# Altium PCB GTU-V1.0-20160325 .PcbDoc (part 5 of 5)
Units mil, origin at the board's own origin, x right, y up, seen from the top; angles counter-clockwise.
Board outline 6299.21 x 4330.71 mil, 4 copper layers (Top Layer, POWER, GND, Bottom Layer); 208 components, 165 nets, 695 pads, 348 vias.
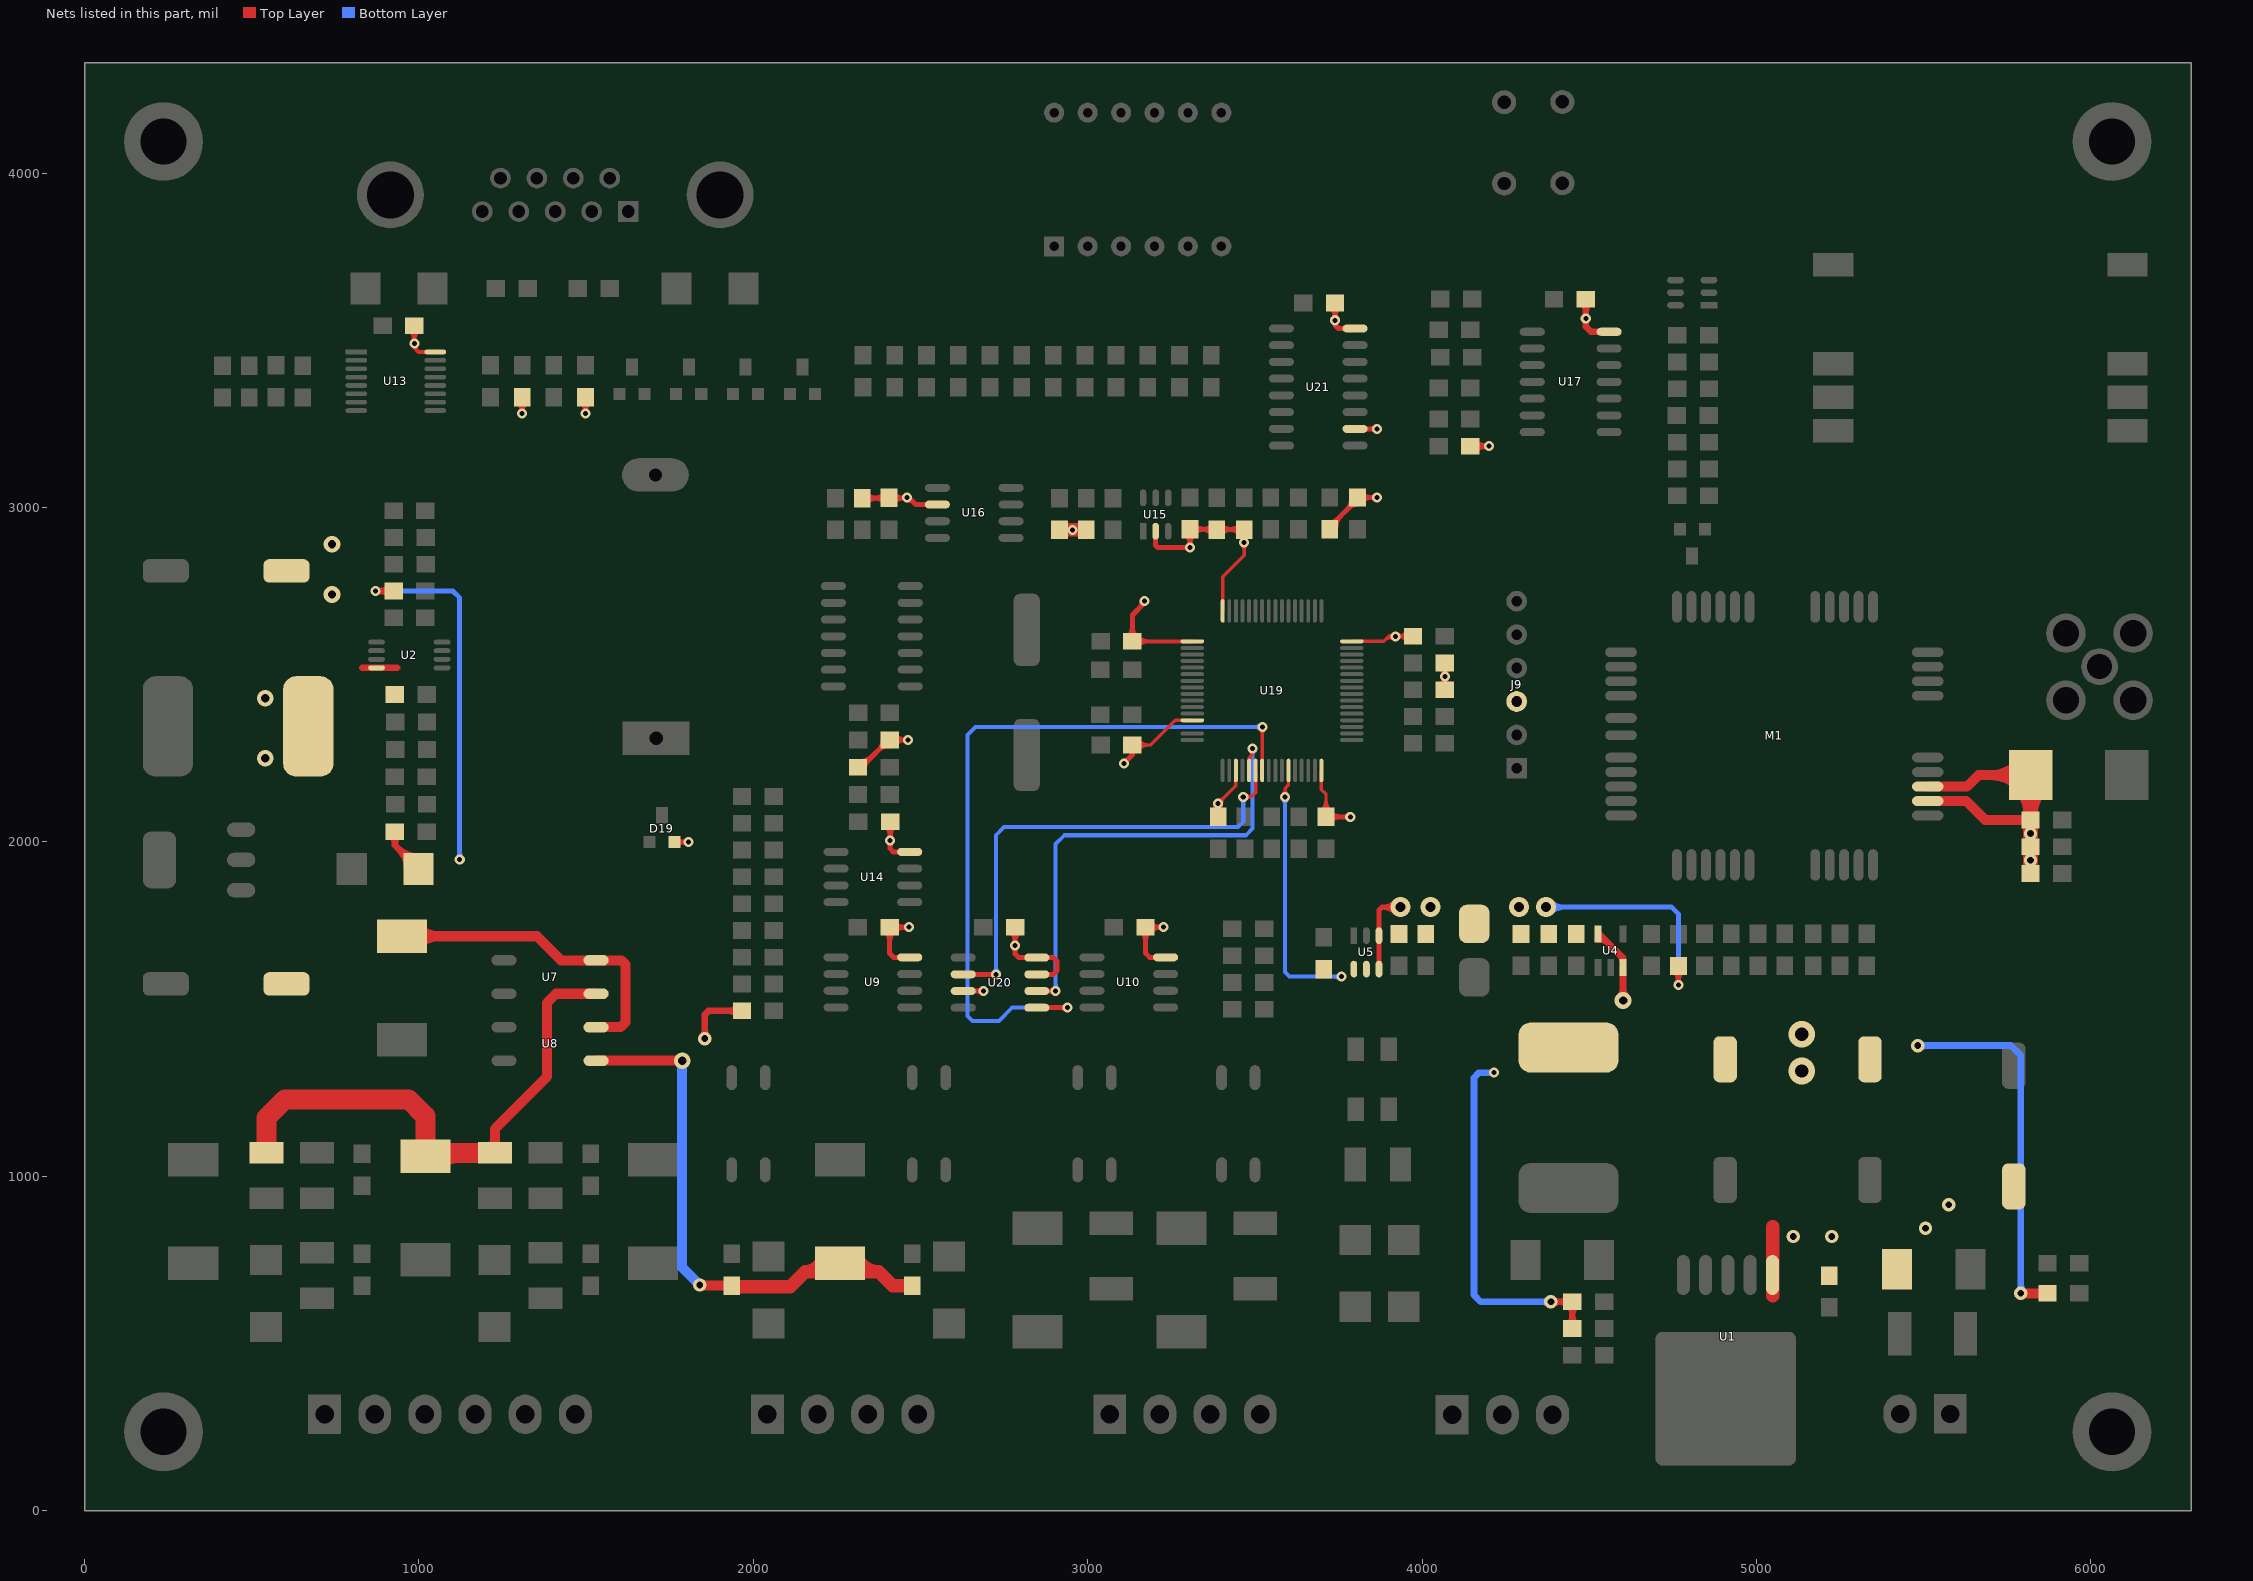
[diagram p7: the nets of this part, all layers, seen from the top]

## Via types
v1: diameter 30, hole 15, Top Layer to Bottom Layer, 262 vias
v2: diameter 40, hole 20, Top Layer to Bottom Layer, 36 vias
v3: diameter 40, hole 40, Top Layer to Bottom Layer, 16 vias
v4: diameter 80, hole 40, Top Layer to Bottom Layer, 12 vias
v5: diameter 60, hole 30, Top Layer to Bottom Layer, 11 vias
v6: diameter 50, hole 25, Top Layer to Bottom Layer, 10 vias
v7: diameter 70, hole 35, Top Layer to Bottom Layer, 1 vias

## Nets (pads, with @x,y where several pads share a name; then routed paths per layer and width w, separated by ;. In a path a pad name is that pad's centre, name@x,y a point inside that pad or via, vN(x,y) a via of type N, cw(c..) or ccw(c..) an arc to the next point about the centre after c; other vN are vias at no path point) (continued)
SPIMISO: U19.22 U20.2 | length 1732.1
  Top Layer w10: v1(3465,2135) 3489.54,2135 3501.89,2147.35 U19.22@3501.89,2213.86 ; 3489.14,2135 cw(c3489.14,2159.14) 3472.07,2142.07 ccw(c3489.14,2159.14) 3489.14,2135 ; 3489.14,2135 ccw(c3489.14,2110.86) 3472.07,2127.93 cw(c3489.14,2110.86) 3489.14,2135
  Top Layer w15: U20.2@2627.6,1604.22 v1(2726,1604.22) ; 2707.89,1604.22 cw(c2707.89,1586.11) 2720.7,1598.92 ccw(c2707.89,1586.11) 2707.89,1604.22 ; 2707.89,1604.22 ccw(c2707.89,1622.33) 2720.7,1609.52 cw(c2707.89,1622.33) 2707.89,1604.22
  Bottom Layer w12: v1(2726,1604.22) 2726,2020 2750,2044 3450,2044 3465,2059 v1@3465,2144 ; 2726,1625.95 cw(c2704.27,1625.95) 2719.64,1610.58 ccw(c2704.27,1625.95) 2726,1625.95 ; 2726,1625.95 ccw(c2747.73,1625.95) 2732.36,1610.58 cw(c2747.73,1625.95) 2726,1625.95 ; 3465,2113.27 cw(c3486.73,2113.27) 3471.36,2128.64 ccw(c3486.73,2113.27) 3465,2113.27 ; 3465,2113.27 ccw(c3443.27,2113.27) 3458.64,2128.64 cw(c3443.27,2113.27) 3465,2113.27
SPIMOSI: U19.23 U20.5 | length 2544.6
  Top Layer w10: U19.23@3521.57,2213.86 v1@3521.57,2344 ; v1@3514.93,2336.93 cw(c3498.88,2320.88) 3521.57,2320.88 ccw(c3498.88,2320.88) v1@3514.93,2336.93 ; 3521.57,2318.83 cw(c3547.17,2318.83) 3529.07,2336.93 ccw(c3547.17,2318.83) 3521.57,2318.83
  Top Layer w15: U20.5@2847.6,1504.22 v1(2939.22,1504.22) ; 2921.11,1504.22 cw(c2921.11,1486.11) 2933.92,1498.92 ccw(c2921.11,1486.11) 2921.11,1504.22 ; 2921.11,1504.22 ccw(c2921.11,1522.33) 2933.92,1509.52 cw(c2921.11,1522.33) 2921.11,1504.22
  Bottom Layer w12: v1(2939.22,1504.22) 2774.22,1504.22 2735,1465 2655,1465 2640,1480 2640,2320 2664,2344 v1(3522,2344) ; 2917.49,1504.22 cw(c2917.49,1482.49) 2932.86,1497.86 ccw(c2917.49,1482.49) 2917.49,1504.22 ; 2917.49,1504.22 ccw(c2917.49,1525.95) 2932.86,1510.58 cw(c2917.49,1525.95) 2917.49,1504.22 ; 3500.27,2344 cw(c3500.27,2322.27) 3515.64,2337.64 ccw(c3500.27,2322.27) 3500.27,2344 ; 3500.27,2344 ccw(c3500.27,2365.73) 3515.64,2350.36 cw(c3500.27,2365.73) 3500.27,2344
SPISCK: U19.21 U20.6 | length 1679.8
  Top Layer w10: U19.21@3482.2,2213.86 3482.2,2252.2 3493,2263 ; v1(3493,2279) 3493,2263 ; 3493,2263 cw(c3500.8,2263) 3497.38,2270.01 ccw(c3500.8,2263) 3493,2263 ; 3493,2263 ccw(c3485.2,2263) 3488.62,2270.01 cw(c3485.2,2263) 3493,2263 ; U19.21@3483.11,2242.95 cw(c3507.63,2242.95) 3490.29,2260.29 ccw(c3507.63,2242.95) U19.21@3483.11,2242.95
  Top Layer w15: U20.6@2847.6,1554.22 v1(2904.22,1554.22) ; 2886.11,1554.22 cw(c2886.11,1536.11) 2898.92,1548.92 ccw(c2886.11,1536.11) 2886.11,1554.22 ; 2886.11,1554.22 ccw(c2886.11,1572.33) 2898.92,1559.52 cw(c2886.11,1572.33) 2886.11,1554.22
  Bottom Layer w12: v1(2904.22,1554.22) 2904.22,1994.22 2930,2020 3473,2020 3493,2040 v1(3493,2279) ; 2904.22,1575.95 cw(c2882.49,1575.95) 2897.86,1560.58 ccw(c2882.49,1575.95) 2904.22,1575.95 ; 2904.22,1575.95 ccw(c2925.95,1575.95) 2910.58,1560.58 cw(c2925.95,1575.95) 2904.22,1575.95 ; 3493,2257.27 cw(c3514.73,2257.27) 3499.36,2272.64 ccw(c3514.73,2257.27) 3493,2257.27 ; 3493,2257.27 ccw(c3471.27,2257.27) 3486.64,2272.64 cw(c3471.27,2257.27) 3493,2257.27
VCC_3V: C8.1 C9.1 C11.1 C12.1 C14.1 C15.1 C19.2 C20.1 C32.1 C33.1 C38.1 C39.1 C40.1 C41.1 C42.1 C43.1 C44.1 C45.1 C46.1 D19.2 J9.3 L3.2 R12.2 R22.2 R23.2 R27.2 R28.2 R30.2 R43.2 R44.2 R47.2 R57.1 R71.2 R75.2 R76.2 R87.2 U5.3 U5.4 U9.8 U10.8 U13.16 U14.8 U15.2 U16.2 U17.14 U19.1 U19.13 U19.19 U19.32 U19.48 U19.64 U20.3 U20.7 U20.8 U21.10 U21.16 | length 12255.2
  Top Layer w10: C45.1@3133.6,2290 3188,2290 3261.78,2363.78 U19.13@3312.6,2363.78 ; v1(3390,2115) 3442.83,2167.83 U19.19@3442.83,2213.86 ; U19.64@3403.46,2690.87 3403.46,2793.46 3467.6,2857.6 C43.1@3467.6,2934 ; U19.32@3698.74,2213.86 3698.74,2156.26 3712.6,2142.4 C41.1@3712.6,2075 ; U19.48@3789.61,2600 3885,2600 3900,2615 ; C42.1@3972.6,2615 3900,2615 ; 3184.38,2290 cw(c3184.38,2338.28) 3150.24,2304.14 ccw(c3184.38,2338.28) 3184.38,2290 ; 3184.38,2290 ccw(c3184.38,2241.72) 3150.24,2275.86 cw(c3184.38,2241.72) 3184.38,2290 ; 3407.07,2132.07 cw(c3390,2149.14) 3390,2125 ccw(c3390,2149.14) 3407.07,2132.07 ; 3407.07,2132.07 ccw(c3424.14,2115) 3400,2115 cw(c3424.14,2115) 3407.07,2132.07 ; 3467.6,2870.86 cw(c3491.74,2870.86) 3474.67,2887.93 ccw(c3491.74,2870.86) 3467.6,2870.86 ; 3467.6,2870.86 ccw(c3443.46,2870.86) 3460.53,2887.93 cw(c3443.46,2870.86) 3467.6,2870.86 ; v1@3467.6,2883.22 cw(c3515.88,2883.22) 3481.74,2917.36 ccw(c3515.88,2883.22) v1@3467.6,2883.22 ; v1@3467.6,2883.22 ccw(c3419.31,2883.22) 3453.46,2917.36 cw(c3419.31,2883.22) v1@3467.6,2883.22 ; C43.1@3467.6,2919.14 cw(c3443.46,2919.14) 3460.53,2902.07 ccw(c3443.46,2919.14) C43.1@3467.6,2919.14 ; C43.1@3467.6,2919.14 ccw(c3491.74,2919.14) 3474.67,2902.07 cw(c3491.74,2919.14) C43.1@3467.6,2919.14 ; 3712.6,2125.78 cw(c3664.31,2125.78) 3698.46,2091.64 ccw(c3664.31,2125.78) 3712.6,2125.78 ; 3712.6,2125.78 ccw(c3760.88,2125.78) 3726.74,2091.64 cw(c3760.88,2125.78) 3712.6,2125.78 ; 3900,2615 cw(c3900,2600) 3912,2609 ccw(c3900,2600) 3900,2615 ; 3900,2615 ccw(c3900,2630) 3912,2621 cw(c3900,2630) 3900,2615 ; v1(3920,2615) ccw(c3915.51,2578.48) 3889.5,2604.5 cw(c3915.51,2578.48) v1(3920,2615) ; v1(3920,2615) ccw(c3910.15,2601.42) 3898.28,2613.28 cw(c3910.15,2601.42) v1(3920,2615) ; v1@3921.81,2615 cw(c3921.81,2566.72) 3955.96,2600.86 ccw(c3921.81,2566.72) v1@3921.81,2615 ; v1@3921.81,2615 ccw(c3921.81,2663.28) 3955.96,2629.14 cw(c3921.81,2663.28) v1@3921.81,2615 ; 3944.14,2615 cw(c3944.14,2639.14) 3927.07,2622.07 ccw(c3944.14,2639.14) 3944.14,2615 ; 3944.14,2615 ccw(c3944.14,2590.86) 3927.07,2607.93 cw(c3944.14,2590.86) 3944.14,2615 ; 3890,2605 cw(c3903.18,2591.82) 3914.13,2606.91 ccw(c3903.18,2591.82) 3890,2605
  Top Layer w12: C19.2@986.21,3544 986.21,3478 999.21,3465 U13.16@1048.71,3465 ; v1(1308.55,3280.67) R28.2@1308.55,3330 ; v1(1498.21,3281) R27.2@1498.21,3330 ; C44.1@3133.6,2600 U19.1@3312.6,2600 ; v1@986.21,3498.13 cw(c1032.08,3498.13) 999.65,3530.56 ccw(c1032.08,3498.13) v1@986.21,3498.13 ; v1@986.21,3498.13 ccw(c940.34,3498.13) 972.78,3530.56 cw(c940.34,3498.13) v1@986.21,3498.13 ; 986.21,3511.73 cw(c964.48,3511.73) 979.85,3496.36 ccw(c964.48,3511.73) 986.21,3511.73 ; 986.21,3511.73 ccw(c1007.94,3511.73) 992.58,3496.36 cw(c1007.94,3511.73) 986.21,3511.73 ; v1@1308.55,3281.63 cw(c1354.42,3281.63) 1321.98,3314.06 ccw(c1354.42,3281.63) v1@1308.55,3281.63 ; v1@1308.55,3281.63 ccw(c1262.68,3281.63) 1295.11,3314.06 cw(c1262.68,3281.63) v1@1308.55,3281.63 ; 1308.55,3302.39 cw(c1286.82,3302.39) 1302.18,3287.03 ccw(c1286.82,3302.39) 1308.55,3302.39 ; 1308.55,3302.39 ccw(c1330.27,3302.39) 1314.91,3287.03 cw(c1330.27,3302.39) 1308.55,3302.39 ; v1@1498.21,3281.63 cw(c1544.08,3281.63) 1511.65,3314.06 ccw(c1544.08,3281.63) v1@1498.21,3281.63 ; v1@1498.21,3281.63 ccw(c1452.34,3281.63) 1484.78,3314.06 cw(c1452.34,3281.63) v1@1498.21,3281.63 ; R27.2@1498.21,3302.73 cw(c1476.48,3302.73) 1491.85,3287.36 ccw(c1476.48,3302.73) R27.2@1498.21,3302.73 ; R27.2@1498.21,3302.73 ccw(c1519.94,3302.73) 1504.58,3287.36 cw(c1519.94,3302.73) R27.2@1498.21,3302.73 ; 3181.97,2600 cw(c3181.97,2645.87) 3149.53,2613.44 ccw(c3181.97,2645.87) 3181.97,2600 ; 3181.97,2600 ccw(c3181.97,2554.13) 3149.53,2586.56 cw(c3181.97,2554.13) 3181.97,2600 ; v1@992.89,3483.96 ccw(c999.86,3477.65) 993.21,3471 cw(c999.86,3477.65) v1@992.89,3483.96
  Top Layer w15: D19.2@1764.21,2000 v1(1806,2000) ; R76.2@2313,2223 R76.2@2326.21,2223 ; R47.2@2325.6,3028 2467,3028 2486,3009 U16.2@2550.6,3009 ; R76.2@2326.21,2227 R75.2@2408.21,2309 ; R75.2@2408.21,2305 v1(2462,2305) ; C20.1@2409.21,2060 2409.21,1979.79 2419,1970 U14.8@2467.6,1970 ; 2437.06,3028 ccw(c2437.06,3052.93) v1@2454.7,3035.3 ; v1@2460,3022.5 cw(c2460,2992.32) 2481.34,3013.66 ; v1(2465,1745) C14.1@2407.6,1745 2407.6,1666.4 2419,1655 U9.8@2467.6,1655 ; U20.3@2627.6,1554.22 v1(2687.78,1554.22) ; C39.1@2782.6,1745 2782.6,1665.4 2793.78,1654.22 2896.78,1654.22 2908,1643 2908,1615 2897.22,1604.22 U20.7@2847.6,1604.22 ; v1(3108,2235) 3133.6,2260.6 ; C45.1@3133.6,2290 3133.6,2260.6 ; C44.1@3133.6,2600 3133.6,2678.6 3170,2715 v1(3170,2720) ; U15.2@3203.1,2929 3203.1,2886.9 3210,2880 v1@3305.6,2880 ; v1@3230,1745 C15.1@3172.6,1745 3172.6,1667.4 3185,1655 U10.8@3232.6,1655 ; v1(3305.6,2880.6) R44.2@3305.6,2935 3466.6,2935 C43.1@3467.6,2934 ; C41.1@3712.6,2075 v1(3785,2075) ; R71.2@3723.85,2935 R71.2@3723.85,2947.5 ; R71.2@3723.85,2942.5 R30.2@3806.35,3025 ; C46.1@3739.21,3611.61 3739.21,3545.79 3749.61,3535.39 U21.16@3799.21,3535.39 ; U21.10@3799.21,3235.39 v1(3865,3235.39) ; R30.2@3806.35,3030 v1(3865,3030) ; U5.4@3870.83,1619.78 3870.83,1795.83 3880,1805 v5(3935,1805) ; v1(4766.21,1572.79) R12.2@4766.21,1629 ; 1787.89,2000 cw(c1787.89,1981.89) 1800.7,1994.7 ccw(c1787.89,1981.89) 1787.89,2000 ; 1787.89,2000 ccw(c1787.89,2018.11) 1800.7,2005.3 cw(c1787.89,2018.11) 1787.89,2000 ; 1789.56,2000 cw(c1789.56,2025.35) 1771.64,2007.42 ccw(c1789.56,2025.35) 1789.56,2000 ; 1789.56,2000 ccw(c1789.56,1974.65) 1771.64,1992.58 cw(c1789.56,1974.65) 1789.56,2000 ; 2367.85,3028 cw(c2367.85,3070.25) 2337.97,3040.37 ccw(c2367.85,3070.25) 2367.85,3028 ; 2367.85,3028 ccw(c2367.85,2985.75) 2337.97,3015.63 cw(c2367.85,2985.75) 2367.85,3028 ; 2407.6,1702.75 cw(c2449.85,1702.75) 2419.97,1732.63 ccw(c2449.85,1702.75) 2407.6,1702.75 ; 2407.6,1702.75 ccw(c2365.35,1702.75) 2395.22,1732.63 cw(c2365.35,1702.75) 2407.6,1702.75 ; 2409.21,1986.89 cw(c2427.32,1986.89) 2414.52,1999.7 ccw(c2427.32,1986.89) 2409.21,1986.89 ; 2409.21,1986.89 ccw(c2391.11,1986.89) 2403.91,1999.7 cw(c2391.11,1986.89) 2409.21,1986.89 ; v1@2409.21,2017.75 cw(c2451.46,2017.75) 2421.59,2047.63 ccw(c2451.46,2017.75) v1@2409.21,2017.75 ; v1@2409.21,2017.75 ccw(c2366.96,2017.75) 2396.84,2047.63 cw(c2366.96,2017.75) v1@2409.21,2017.75 ; 2409.21,2023.11 cw(c2391.11,2023.11) 2403.91,2010.3 ccw(c2391.11,2023.11) 2409.21,2023.11 ; 2409.21,2023.11 ccw(c2427.32,2023.11) 2414.52,2010.3 cw(c2427.32,2023.11) 2409.21,2023.11 ; 2443.89,2305 cw(c2443.89,2286.89) 2456.7,2299.7 ccw(c2443.89,2286.89) 2443.89,2305 ; 2443.89,2305 ccw(c2443.89,2323.11) 2456.7,2310.3 cw(c2443.89,2323.11) 2443.89,2305 ; 2446.89,1745 cw(c2446.89,1726.89) 2459.7,1739.7 ccw(c2446.89,1726.89) 2446.89,1745 ; 2446.89,1745 ccw(c2446.89,1763.11) 2459.7,1750.3 cw(c2446.89,1763.11) 2446.89,1745 ; v1@2452.35,1745 cw(c2452.35,1787.25) 2422.47,1757.37 ccw(c2452.35,1787.25) v1@2452.35,1745 ; v1@2452.35,1745 ccw(c2452.35,1702.75) 2422.47,1732.63 cw(c2452.35,1702.75) v1@2452.35,1745 ; v1@2452.96,2305 cw(c2452.96,2347.25) 2423.09,2317.37 ccw(c2452.96,2347.25) v1@2452.96,2305 ; v1@2452.96,2305 ccw(c2452.96,2262.75) 2423.09,2292.63 cw(c2452.96,2262.75) v1@2452.96,2305 ; 2669.67,1554.22 cw(c2669.67,1536.11) 2682.48,1548.92 ccw(c2669.67,1536.11) 2669.67,1554.22 ; 2669.67,1554.22 ccw(c2669.67,1572.33) 2682.48,1559.52 cw(c2669.67,1572.33) 2669.67,1554.22 ; 2782.6,1671.89 cw(c2800.7,1671.89) 2787.9,1684.7 ccw(c2800.7,1671.89) 2782.6,1671.89 ; 2782.6,1671.89 ccw(c2764.49,1671.89) 2777.3,1684.7 cw(c2764.49,1671.89) 2782.6,1671.89 ; v1@2782.6,1702.75 cw(c2824.85,1702.75) 2794.97,1732.63 ccw(c2824.85,1702.75) v1@2782.6,1702.75 ; v1@2782.6,1702.75 ccw(c2740.35,1702.75) 2770.22,1732.63 cw(c2740.35,1702.75) v1@2782.6,1702.75 ; 2782.6,1708.11 cw(c2764.49,1708.11) 2777.3,1695.3 ccw(c2764.49,1708.11) 2782.6,1708.11 ; 2782.6,1708.11 ccw(c2800.7,1708.11) 2787.9,1695.3 cw(c2800.7,1708.11) 2782.6,1708.11 ; 3120.8,2247.8 cw(c3108,2260.61) 3108,2242.5 ccw(c3108,2260.61) 3120.8,2247.8 ; 3120.8,2247.8 ccw(c3133.61,2235) 3115.5,2235 cw(c3133.61,2235) 3120.8,2247.8 ; 3133.6,2260.6 cw(c3149.54,2260.6) 3141.94,2274.62 ccw(c3149.54,2260.6) 3133.6,2260.6 ; 3133.6,2260.6 ccw(c3117.65,2260.6) 3125.25,2274.62 cw(c3117.65,2260.6) 3133.6,2260.6 ; 3133.6,2642.25 cw(c3091.35,2642.25) 3121.22,2612.37 ccw(c3091.35,2642.25) 3133.6,2642.25 ; 3133.6,2642.25 ccw(c3175.85,2642.25) 3145.97,2612.37 cw(c3175.85,2642.25) 3133.6,2642.25 ; 3172.6,1702.75 cw(c3214.85,1702.75) 3184.97,1732.63 ccw(c3214.85,1702.75) 3172.6,1702.75 ; 3172.6,1702.75 ccw(c3130.35,1702.75) 3160.22,1732.63 cw(c3130.35,1702.75) 3172.6,1702.75 ; 3208.89,1745 cw(c3208.89,1726.89) 3221.7,1739.7 ccw(c3208.89,1726.89) 3208.89,1745 ; 3208.89,1745 ccw(c3208.89,1763.11) 3221.7,1750.3 cw(c3208.89,1763.11) 3208.89,1745 ; v1@3217.35,1745 cw(c3217.35,1787.25) 3187.47,1757.37 ccw(c3217.35,1787.25) v1@3217.35,1745 ; v1@3217.35,1745 ccw(c3217.35,1702.75) 3187.47,1732.63 cw(c3217.35,1702.75) v1@3217.35,1745 ; v1@3300.3,2885.9 ccw(c3287.49,2898.7) 3305.6,2898.7 ; v1@3300.3,2885.9 cw(c3286.05,2900.15) 3286.05,2880 ccw(c3286.05,2900.15) v1@3300.3,2885.9 ; v1@3300.3,2885.9 ccw(c3287.49,2898.7) 3305.6,2898.7 ; v1@3305.6,2890.25 cw(c3347.85,2890.25) 3317.97,2920.13 ccw(c3347.85,2890.25) v1@3305.6,2890.25 ; v1@3305.6,2890.25 ccw(c3263.35,2890.25) 3293.22,2920.13 cw(c3263.35,2890.25) v1@3305.6,2890.25 ; 3305.6,2898.7 ccw(c3323.7,2898.7) 3310.9,2885.9 cw(c3323.7,2898.7) 3305.6,2898.7 ; 3347.85,2935 cw(c3347.85,2977.25) 3317.97,2947.37 ccw(c3347.85,2977.25) 3347.85,2935 ; 3347.85,2935 ccw(c3347.85,2892.75) 3317.97,2922.63 cw(c3347.85,2892.75) 3347.85,2935 ; v1@3739.21,3569.37 cw(c3781.46,3569.37) 3751.59,3599.24 ccw(c3781.46,3569.37) v1@3739.21,3569.37 ; v1@3739.21,3569.37 ccw(c3696.96,3569.37) 3726.84,3599.24 cw(c3696.96,3569.37) v1@3739.21,3569.37 ; 3754.85,2075 cw(c3754.85,2117.25) 3724.97,2087.37 ccw(c3754.85,2117.25) 3754.85,2075 ; 3754.85,2075 ccw(c3754.85,2032.75) 3724.97,2062.63 cw(c3754.85,2032.75) 3754.85,2075 ; 3766.89,2075 cw(c3766.89,2056.89) 3779.7,2069.7 ccw(c3766.89,2056.89) 3766.89,2075 ; 3766.89,2075 ccw(c3766.89,2093.11) 3779.7,2080.3 cw(c3766.89,2093.11) 3766.89,2075 ; 3846.89,3030 cw(c3846.89,3011.89) 3859.7,3024.7 ccw(c3846.89,3011.89) 3846.89,3030 ; 3846.89,3030 ccw(c3846.89,3048.11) 3859.7,3035.3 cw(c3846.89,3048.11) 3846.89,3030 ; 3846.89,3235.39 cw(c3846.89,3217.28) 3859.7,3230.08 ccw(c3846.89,3217.28) 3846.89,3235.39 ; 3846.89,3235.39 ccw(c3846.89,3253.49) 3859.7,3240.69 cw(c3846.89,3253.49) 3846.89,3235.39 ; 3848.6,3030 cw(c3848.6,3072.25) 3818.72,3042.37 ccw(c3848.6,3072.25) 3848.6,3030 ; 3848.6,3030 ccw(c3848.6,2987.75) 3818.72,3017.63 cw(c3848.6,2987.75) 3848.6,3030 ; 3880.68,1805 cw(c3880.68,1750.68) 3919.09,1789.09 ccw(c3880.68,1750.68) 3880.68,1805 ; 3880.68,1805 ccw(c3880.68,1859.32) 3919.09,1820.91 cw(c3880.68,1859.32) 3880.68,1805 ; v1@4766.21,1584.25 cw(c4808.46,1584.25) 4778.59,1614.13 ccw(c4808.46,1584.25) v1@4766.21,1584.25 ; v1@4766.21,1584.25 ccw(c4723.96,1584.25) 4753.84,1614.13 cw(c4723.96,1584.25) v1@4766.21,1584.25 ; 4766.21,1590.89 cw(c4748.11,1590.89) 4760.91,1578.09 ccw(c4748.11,1590.89) 4766.21,1590.89 ; 4766.21,1590.89 ccw(c4784.32,1590.89) 4771.52,1578.09 cw(c4784.32,1590.89) 4766.21,1590.89 ; R76.2@2315.5,2240.5 ccw(c2315.5,2298.95) 2356.83,2257.62 cw(c2315.5,2298.95) R76.2@2315.5,2240.5 ; R76.2@2333,2223 cw(c2359.04,2223) 2340.63,2241.42 ccw(c2359.04,2223) R76.2@2333,2223 ; 2360.94,3028 ccw(c2360.94,3073.66) 2393.22,3041.37 cw(c2360.94,3073.66) 2360.94,3028 ; 2365.76,3028 cw(c2365.76,2989.17) 2393.22,3016.63 ccw(c2365.76,2989.17) 2365.76,3028 ; 2373.28,2274.06 cw(c2405.71,2241.63) 2405.71,2287.5 ccw(c2405.71,2241.63) 2373.28,2274.06 ; 2376.9,2277.69 ccw(c2349.59,2305) 2388.21,2305 cw(c2349.59,2305) 2376.9,2277.69 ; C33.1@2417.97,3016.63 cw(c2445.43,2989.17) 2445.43,3028 ccw(c2445.43,2989.17) C33.1@2417.97,3016.63 ; C33.1@2417.97,3041.37 ccw(c2450.26,3073.66) 2450.26,3028 cw(c2450.26,3073.66) C33.1@2417.97,3041.37 ; 3153.66,2698.66 ccw(c3132.32,2720) 3162.5,2720 cw(c3132.32,2720) 3153.66,2698.66 ; 3288.94,2880 cw(c3288.94,2863.94) 3300.3,2875.3 ccw(c3288.94,2863.94) 3288.94,2880 ; 3340.94,2935 cw(c3340.94,2889.34) 3373.22,2921.63 ccw(c3340.94,2889.34) 3340.94,2935 ; 3345.76,2935 ccw(c3345.76,2973.83) 3373.22,2946.37 cw(c3345.76,2973.83) 3345.76,2935 ; C32.1@3397.97,2921.63 cw(c3430.26,2889.34) 3430.26,2935 ccw(c3430.26,2889.34) C32.1@3397.97,2921.63 ; C32.1@3397.97,2946.37 ccw(c3425.43,2973.83) 3425.43,2935 cw(c3425.43,2973.83) C32.1@3397.97,2946.37 ; 3422.94,2935 cw(c3422.94,2889.34) 3455.22,2921.63 ccw(c3422.94,2889.34) 3422.94,2935 ; 3427.76,2935 ccw(c3427.76,2973.83) 3455.22,2946.37 cw(c3427.76,2973.83) 3427.76,2935 ; R71.2@3723.85,2955 ccw(c3723.85,2985.18) 3745.19,2963.84 cw(c3723.85,2985.18) R71.2@3723.85,2955 ; v1@3734.7,3565.3 ccw(c3723.79,3576.21) 3739.21,3576.21 cw(c3723.79,3576.21) v1@3734.7,3565.3 ; 3739.21,3580.01 ccw(c3760.01,3580.01) 3745.3,3565.3 cw(c3760.01,3580.01) 3739.21,3580.01 ; R71.2@3741.35,2937.5 cw(c3795.67,2937.5) 3757.26,2975.91 ccw(c3795.67,2937.5) R71.2@3741.35,2937.5 ; 3774.71,2993.36 ccw(c3740.56,3027.5) 3788.85,3027.5 cw(c3740.56,3027.5) 3774.71,2993.36 ; 3780.74,2999.39 cw(c3806.35,2973.79) 3806.35,3010 ccw(c3806.35,2973.79) 3780.74,2999.39
  Top Layer w20: R23.2@4067.6,2455 R22.2@4067.6,2535 ; R57.1@4144.21,3183.61 v1@4202.83,3183.61 ; C38.1@4489.21,3622.61 4489.21,3541 4504.6,3525.61 U17.14@4559.21,3525.61 ; v1@4067.6,2491.21 cw(c4031.39,2491.21) 4056.99,2465.61 ccw(c4031.39,2491.21) v1@4067.6,2491.21 ; v1@4067.6,2491.21 ccw(c4103.81,2491.21) 4078.21,2465.61 cw(c4103.81,2491.21) v1@4067.6,2491.21 ; v1@4067.6,2498.79 cw(c4103.81,2498.79) 4078.21,2524.39 ccw(c4103.81,2498.79) v1@4067.6,2498.79 ; v1@4067.6,2498.79 ccw(c4031.39,2498.79) 4056.99,2524.39 cw(c4031.39,2498.79) v1@4067.6,2498.79 ; 4182.93,3183.61 cw(c4182.93,3219.83) 4157.32,3194.22 ccw(c4182.93,3219.83) 4182.93,3183.61 ; 4182.93,3183.61 ccw(c4182.93,3147.4) 4157.32,3173.01 cw(c4182.93,3147.4) 4182.93,3183.61 ; 4489.21,3586.4 cw(c4525.43,3586.4) 4499.82,3612.01 ccw(c4525.43,3586.4) 4489.21,3586.4 ; 4489.21,3586.4 ccw(c4453,3586.4) 4478.61,3612.01 cw(c4453,3586.4) 4489.21,3586.4
  Top Layer w30: C40.1@3390,2075 v1(3390,2115)
  Top Layer w40: R87.2@2915.6,2933 R43.2@2995.6,2933
  Bottom Layer w15: v5(4370,1805) 4746.21,1805 4766.21,1785 v1(4766.21,1572.79) ; 4424.32,1805 cw(c4424.32,1859.32) 4385.91,1820.91 ccw(c4424.32,1859.32) 4424.32,1805 ; 4424.32,1805 ccw(c4424.32,1750.68) 4385.91,1789.09 cw(c4424.32,1750.68) 4424.32,1805 ; 4766.21,1590.89 cw(c4748.11,1590.89) 4760.91,1578.09 ccw(c4748.11,1590.89) 4766.21,1590.89 ; 4766.21,1590.89 ccw(c4784.32,1590.89) 4771.52,1578.09 cw(c4784.32,1590.89) 4766.21,1590.89
  other v1: 2782.6,1690 3227,1745 2409.21,2005 4067.6,2495 3467.6,2895 2955,2933 2460,3030 4199.83,3183.61 986.21,3490 3740,3560 4489.21,3565
  other v5: 4025,1805 4290,1805
VCC_4.1V: C1.1 C13.1 C29.1 C30.1 C31.1 EC3.1 EC4.1 EC6.1 L1.2 M1.33 M1.34 R1.2 R2.1 U4.1 U4.4 | length 4926.4
  Top Layer w20: v2(4385,625) R1.2@4449.21,625 C1.1@4449.21,545 ; U4.4@4528.83,1724.78 4600.83,1652.78 ; v6(4600.83,1525.83) U4.1@4600.83,1624.78 ; 4409.14,625 cw(c4409.14,649.14) 4392.07,632.07 ccw(c4409.14,649.14) 4409.14,625 ; 4409.14,625 ccw(c4409.14,600.86) 4392.07,617.93 cw(c4409.14,600.86) 4409.14,625 ; 4410.5,625 cw(c4410.5,588.79) 4436.11,614.39 ccw(c4410.5,588.79) 4410.5,625 ; 4410.5,625 ccw(c4410.5,661.21) 4436.11,635.61 cw(c4410.5,661.21) 4410.5,625 ; 4449.21,581.21 cw(c4413,581.21) 4438.61,555.61 ccw(c4413,581.21) 4449.21,581.21 ; 4449.21,581.21 ccw(c4485.43,581.21) 4459.82,555.61 cw(c4485.43,581.21) 4449.21,581.21 ; 4449.21,588.79 cw(c4485.43,588.79) 4459.82,614.39 ccw(c4485.43,588.79) 4449.21,588.79 ; 4449.21,588.79 ccw(c4413,588.79) 4438.61,614.39 cw(c4413,588.79) 4449.21,588.79 ; 4600.83,1562.04 cw(c4564.61,1562.04) 4590.22,1536.43 ccw(c4564.61,1562.04) 4600.83,1562.04 ; 4600.83,1562.04 ccw(c4637.04,1562.04) 4611.43,1536.43 cw(c4637.04,1562.04) 4600.83,1562.04 ; U4.4@4525.83,1709.78 cw(c4525.83,1666.32) 4556.55,1697.05 ccw(c4525.83,1666.32) U4.4@4525.83,1709.78 ; 4591.63,1661.97 cw(c4569.44,1639.78) 4600.83,1639.78 ccw(c4569.44,1639.78) 4591.63,1661.97
  Top Layer w30: M1.33@5511.98,2122.29 5626.92,2122.29 5683.83,2065.39 C29.1@5819.21,2065.39 ; M1.34@5511.98,2165.6 5629.81,2165.6 5664.21,2200 5805,2200 EC6.1@5810,2195 ; v2@5790,650 R2.1@5870,650 ; 5699.5,2200 cw(c5699.5,2079.29) 5784.86,2164.64 ccw(c5699.5,2079.29) 5699.5,2200 ; 5699.5,2200 ccw(c5699.5,2320.71) 5784.86,2235.36 cw(c5699.5,2320.71) 5699.5,2200
  Top Layer w45: C31.1@5819.21,1905.39 EC6.1@5819.21,2200 ; EC6.1@5790.16,2159.95 cw(c5720.02,2089.81) 5819.21,2089.81 ccw(c5720.02,2089.81) EC6.1@5790.16,2159.95 ; C29.1@5819.21,2084.98 cw(c5925.23,2084.98) 5850.26,2159.95 ccw(c5925.23,2084.98) C29.1@5819.21,2084.98
  Bottom Layer w20: v1(4215,1310) 4170,1310 4155,1295 4155,645 4175,625 v2@4383.21,625 ; v2(5482.21,1391) 5760.21,1391 5790.21,1361 v2(5790.21,650) ; 4360.86,625 cw(c4360.86,600.86) 4377.93,617.93 ccw(c4360.86,600.86) 4360.86,625 ; 4360.86,625 ccw(c4360.86,649.14) 4377.93,632.07 cw(c4360.86,649.14) 4360.86,625 ; 5506.35,1391 cw(c5506.35,1415.14) 5489.28,1398.07 ccw(c5506.35,1415.14) 5506.35,1391 ; 5506.35,1391 ccw(c5506.35,1366.86) 5489.28,1383.93 cw(c5506.35,1366.86) 5506.35,1391 ; 5790.21,674.14 cw(c5766.07,674.14) 5783.14,657.07 ccw(c5766.07,674.14) 5790.21,674.14 ; 5790.21,674.14 ccw(c5814.35,674.14) 5797.28,657.07 cw(c5814.35,674.14) 5790.21,674.14
  other v2: 5819.21,1945 5819.21,2025
  other v4: 5135,1315 5135,1425
VCC_12V: C2.1 C3.1 D1.K EC1.1 EC2.1 L2.2 R16.2 U1.1@5047.6,705 U2.8 | length 689.4
  Top Layer w20: 830.21,2521 935.21,2521 ; v2(1855,1412) 1855,1484 1866,1495 R16.2@1966.21,1495 ; 1855,1436.14 cw(c1830.86,1436.14) 1847.93,1419.07 ccw(c1830.86,1436.14) 1855,1436.14 ; 1855,1436.14 ccw(c1879.14,1436.14) 1862.07,1419.07 cw(c1879.14,1436.14) 1855,1436.14 ; 1927.5,1495 cw(c1927.5,1458.79) 1953.11,1484.39 ccw(c1927.5,1458.79) 1927.5,1495 ; 1927.5,1495 ccw(c1927.5,1531.21) 1953.11,1505.61 cw(c1927.5,1531.21) 1927.5,1495
  Top Layer w40: 5048.21,643 5048.21,850
  other v2: 5110,820 5225,820 5505,845 5575,915
  other v6: 540,2250 540,2430 740,2740 740,2890
VCC_24V: C5.1 D3.K D4.K EC5.1 R4.2 U7.6 U8.6 | length 3080.6
  Top Layer w20: v1(870,2750.61) R4.2@924.21,2750.61 ; C5.1@928.21,2030.61 928.21,1990 D3.K@999.21,1919 ; 885.5,2750.61 cw(c885.5,2714.4) 911.11,2740.01 ccw(c885.5,2714.4) 885.5,2750.61 ; 885.5,2750.61 ccw(c885.5,2786.83) 911.11,2761.22 cw(c885.5,2786.83) 885.5,2750.61 ; 928.21,1994.4 cw(c964.43,1994.4) 938.82,2020.01 ccw(c964.43,1994.4) 928.21,1994.4 ; 928.21,1994.4 ccw(c892,1994.4) 917.61,2020.01 cw(c892,1994.4) 928.21,1994.4 ; 935.2,1983.02 ccw(c999.21,2047.03) 999.21,1956.5 cw(c999.21,2047.03) 935.2,1983.02 ; 941.23,1976.98 cw(c885.75,1921.5) 964.21,1921.5 ccw(c885.75,1921.5) 941.23,1976.98
  Top Layer w30: D4.K@949.21,1718 1353,1718 1425,1646 1605,1646 1617,1634 1617,1460 1603,1446 U8.6@1529.8,1446 ; 1058.71,1718 cw(c1058.71,1802.5) 998.96,1742.75 ccw(c1058.71,1802.5) 1058.71,1718 ; 1058.71,1718 ccw(c1058.71,1633.5) 998.96,1693.25 cw(c1058.71,1633.5) 1058.71,1718
  Bottom Layer w15: v1(870,2750.61) 1101.39,2750.61 1122,2730 v1(1122,1947) ; 888.11,2750.61 cw(c888.11,2768.72) 875.3,2755.92 ccw(c888.11,2768.72) 888.11,2750.61 ; 888.11,2750.61 ccw(c888.11,2732.51) 875.3,2745.31 cw(c888.11,2732.51) 888.11,2750.61 ; 1122,1965.11 cw(c1103.89,1965.11) 1116.7,1952.3 ccw(c1103.89,1965.11) 1122,1965.11 ; 1122,1965.11 ccw(c1140.11,1965.11) 1127.3,1952.3 cw(c1140.11,1965.11) 1122,1965.11
VCC_24V_A: D7.K R33.1 R34.1 U7.4 | length 1821.3
  Top Layer w30: R34.1@1215.18,1082.02 ccw(c1186.16,1111.04) 1227.2,1111.04 ccw(c1268.24,1111.04) R34.1@1239.22,1082.02 ; R34.1@1227.2,1070 1227.2,1142.2 1383,1298 1383,1519 1410,1546 U7.4@1529.8,1546
  Top Layer w60: R33.1@543.6,1070 543.6,1174.39 599.21,1230 969.21,1230 1019.21,1180 D7.K@1019.21,1060 1029.21,1070 R34.1@1227.2,1070 ; D7.K@1058.35,1045.86 cw(c1116.64,987.57) 1116.64,1070 ccw(c1116.64,987.57) D7.K@1058.35,1045.86
VCC_24V_B: D8.K R24.1 R25.1 U8.4 | length 1935.1
  Top Layer w30: U8.4@1529.8,1346 v6(1787,1346) ; v2@1842,673 R25.1@1935.21,673
  Top Layer w40: R25.1@1935.21,670 2110,670 2155,715 ; R25.1@1935.21,673 R25.1@1938.21,670 ; D8.K@2245,730 D8.K@2260,715 ; R24.1@2475.21,673 2417,673 2375,715 ; 2155,715 ccw(c2155,769.54) 2206.1,750.48 cw(c2155,769.54) 2155,715 ; 2155,715 2375,715 ; 2375,715 cw(c2375,787.42) 2310.8,753.89 ccw(c2375,787.42) 2375,715
  Bottom Layer w30: v6(1787,1346) 1787,728 v2(1840,675)
VREF_2.5V: C10.1 U5.5 U5.6 U19.27 | length 994.3
  Top Layer w10: v1(3590,2135) 3590,2160 3600.31,2170.31 U19.27@3600.31,2213.86 ; 3590,2159.14 cw(c3565.86,2159.14) 3582.93,2142.07 ccw(c3565.86,2159.14) 3590,2159.14 ; 3590,2159.14 ccw(c3614.14,2159.14) 3597.07,2142.07 cw(c3614.14,2159.14) 3590,2159.14
  Bottom Layer w12: v1(3590,2135) 3590,1611 3604,1597 v1(3759,1597) ; 3590,2113.27 cw(c3611.73,2113.27) 3596.36,2128.64 ccw(c3611.73,2113.27) 3590,2113.27 ; 3590,2113.27 ccw(c3568.27,2113.27) 3583.64,2128.64 cw(c3568.27,2113.27) 3590,2113.27 ; 3737.27,1597 cw(c3737.27,1575.27) 3752.64,1590.64 ccw(c3737.27,1575.27) 3737.27,1597 ; 3737.27,1597 ccw(c3737.27,1618.73) 3752.64,1603.36 cw(c3737.27,1618.73) 3737.27,1597
pads on no net: J3.3 J6. J6.1 J6.4 J6.6 J6.7 J6.8 J6.9 J9.1 M1.1 M1.2 M1.3 M1.4 M1.5 M1.6 M1.7 M1.8 M1.9 M1.11 M1.14 M1.15 M1.16 M1.17 M1.18 M1.19 M1.20 M1.23 M1.25 M1.26 M1.32 M1.41 M1.42 S2.5 S2.7 S2.8 U1.0 U1.1@4907.6,335 U9.5 U9.6 U9.7 U13.7 U13.9 U15.6 U17.8 U17.10 U17.12 U18.6 U19.2 U19.3 U19.4 U19.8 U19.14 U19.26 U19.29 U19.30 U19.34 U19.35 U19.36 U19.41 U21.9 U22.1 U22.3 U22.4 U22.5 U22.7 U22.8 U22.9 U22.10 U22.12 U22.14
copper on no net:
  other v3: 4747.6,180 4847.6,180 4947.6,180 5047.6,180 4747.6,280 4847.6,280 4947.6,280 5047.6,280 4747.6,380 4847.6,380 4947.6,380 5047.6,380 4747.6,480 4847.6,480 4947.6,480 5047.6,480

## Polygon pours and split planes (outlines as drawn)
GND on Top Layer "MidLayer1-No Net" (solid, remove dead copper, pour order 1001): 140,2635 140,2935 155,2950 375,2950 390,2935 390,2635 380,2625 150,2625
GND on Top Layer "MidLayer1-No Net" (solid, remove dead copper, pour order 1001): 3710.57,1761 3669.8,1761 3665.82,1761 3664.83,1759.91 3664.83,1675.04 3664.83,1672.86 3665.82,1671.78 3834.88,1671.78 3841.84,1671.78 3843.83,1673.95 3843.83,1751.21 3843.83,1759.91 3842.83,1761
VREF_2.5V on Top Layer "MidLayer1-No Net" (solid, remove dead copper, pour order 1001): 3710.57,1662.78 3669.8,1662.78 3665.82,1662.78 3664.83,1661.73 3664.83,1579.92 3664.83,1577.82 3665.82,1576.78 3834.88,1576.78 3841.84,1576.78 3843.83,1578.87 3843.83,1653.34 3843.83,1661.73 3842.83,1662.78
VCC_3V on Top Layer "MidLayer1-No Net" (solid, remove dead copper, pour order 1000): 4303.9,1685 3895.05,1685 3890,1690 3890,1840 3895.05,1845 4414.95,1845 4420,1840 4420,1690 4414.95,1685
GND on Top Layer "MidLayer1-No Net" (solid, remove dead copper, pour order 1008): 478.21,1456 759.21,1456 804.21,1501 823.21,1520 1032.21,1520 1120.21,1520 1142.21,1498 1142.21,1329 1126.21,1313 143.21,1313 124.21,1332 124.21,1745 145.21,1766 356.21,1766 372.21,1750 372.21,1466 382.21,1456
VCC_24V on Top Layer "MidLayer1-No Net" (solid, remove dead copper, pour order 1007): 717.21,1496 852.21,1631 1120.21,1631 1139.21,1650 1139.21,1973.5 1138.71,1974 1124.21,1988.5 1124.21,1989 933.21,1989 932.71,1988.5 921.21,1977 921.21,1830 913.21,1822 709.21,1822 594.21,1707 493.21,1707 478.21,1692 478.21,1514 496.21,1496
NetD3_A on Top Layer "MidLayer1-No Net" (solid, remove dead copper, pour order 1006): 363.21,2558 363.21,2004 375.21,1992 872.21,1992 884.21,1980 884.21,1854 876.21,1846 699.21,1846 686.21,1859 686.21,1897 677.21,1906 676.21,1907 416.21,1907 386.21,1907 373.21,1894 373.21,1826 363.21,1816 151.21,1816 140.21,1827 140.21,2555 154.21,2569 157.21,2572 352.21,2572
VCC_12V on Top Layer "MidLayer1-No Net" (solid, remove dead copper, pour order 1005): 474.21,2926.94 474.21,2165.04 489.21,2150 784.21,2150 799.21,2165.04 799.21,2390.6 809.21,2400.62 964.21,2400.62 974.21,2410.65 974.21,2525.94 969.21,2530.95 824.21,2530.95 819.21,2530.95 799.21,2551 799.21,2936.96 784.21,2952 494.21,2952
VCC_12V on Top Layer "MidLayer1-No Net" (solid, remove dead copper, pour order 1003): 5028.21,629.48 5037.69,620 5038.21,620 5131.21,620 5162.49,651.27 5164.21,651.27 5274.21,651.27 5295.06,630.42 5296.21,630.42 5520.84,630.42 5532.21,641.8 5532.21,762.16 5608.98,838.92 5613.21,838.92 5838.21,838.92 6138.13,838.92 6149.21,850 6149.21,1040 6134.21,1055 5843.21,1055 5582.21,1055 5399.3,872.09 5389.21,872.09 5039.59,872.09 5028.21,860.72
VCC_4.1V on Top Layer "MidLayer1-No Net" (solid, remove dead copper, pour order 1002): 4197.21,1251 5515.21,1251 5543.21,1279 5543.21,1475 5523.21,1495 4218.21,1495 4194.21,1471 4180.21,1457 4180.21,1449 4180.21,1268 4197.21,1251
GND on Top Layer "MidLayer1-No Net" (solid, remove dead copper, pour order 1001): 4818.21,896 5384.21,896 5395.21,907 5395.21,1079 5395.21,907 5569.21,1081 5647.21,1081 6142.21,1081 6153.21,1092 6153.21,1560 6152.21,1561 6133.21,1580 5596.21,1580 5579.21,1563 5579.21,1237 5565.21,1223 4826.21,1223 4807.21,1204 4807.21,907
NetD2_K on Top Layer "MidLayer1-No Net" (solid, remove dead copper, pour order 1000): 4977.21,620 5009,620 5009.21,620 5014.21,624.74 5014.21,867.67 5010.21,871.47 4998.58,871.47 4781.21,871.47 4774.21,878.11 4774.5,878.38 4774.5,890.5 4774.5,1060.98 4769.21,1066 4758.86,1066 4183.21,1066 4174.21,1057.46 4175.21,1056.51 4175.21,1024.11 4175.21,1056.51 4174.21,1057.46 4174.21,839.2 4180.21,833.51 4196.06,833.51 4411.21,833.51 4415.21,829.71 4415.21,667.45 4419.21,663.65 4656.21,663.65 4660.21,667.45 4659.85,667.79 4659.85,679.78 4659.85,667.79 4660.21,667.45 4660.21,777.52 4664.21,781.32 4689.21,781.32 4941.47,781.32 4946.47,776.57 4946.47,662.31 4946.47,623.55 4950.21,620
NetL3_1 on Top Layer "MidLayer1-No Net" (solid, remove dead copper, pour order 1000): 4535.83,1662.78 4532.83,1665.78 4499.83,1665.78 4496.83,1662.78 4496.83,1567.73 4490.47,1561.38 4243.7,1561.38 4243.7,1561.67 4238.26,1567.11 4238.26,1659.55 4238.26,1664.34 4231.83,1670.78 4085.83,1670.78 4080.83,1665.78 4080.83,1525.65 4080.83,1524.71 4085.76,1519.78 4529.96,1519.78 4535.83,1525.65
GND on Top Layer "Top Layer-No Net 1" (solid, remove dead copper, pour order 1000): 6220,2690 6220,3620 6200,3640 4450,3640 4430,3620 4430,1580 4450,1560 6190,1560 6220,1590 6220,2760
no net on POWER (split plane): 3619.8,720 3620.58,716.1 3622.79,712.79 3626.1,710.58 3630,709.8 6278.82,709.8 6278.82,20.39 20.39,20.39 20.39,1249.8 3619.8,1249.8
VCC_12V on POWER (split plane): 1189.02,1468 1189.79,1464.1 1192,1460.79 1195.31,1458.58 1199.21,1457.8 1200.21,1458 1201.21,1457.8 4102.02,1457.8 4102.02,1188 4102.79,1184.1 4105,1180.79 4108.31,1178.58 4112.21,1177.8 6278.82,1177.8 6278.82,730.2 3640.2,730.2 3640.2,1260 3639.42,1263.9 3637.21,1267.21 3633.9,1269.42 3630,1270.2 20.39,1270.2 20.39,3119.8 1189.02,3119.8
VCC_4.1V on POWER (split plane): 6278.82,1198.2 4122.41,1198.2 4122.41,1546.8 4498.21,1546.8 4502.11,1547.58 4505.42,1549.79 4507.63,1553.1 4508.41,1557 4508.41,2303.8 6278.82,2303.8
VCC_3V on POWER (split plane): 6278.82,2324.2 4498.21,2324.2 4494.31,2323.42 4491,2321.21 4488.79,2317.9 4488.02,2314 4488.02,1567.2 4112.21,1567.2 4108.31,1566.42 4105,1564.21 4102.79,1560.9 4102.02,1557 4102.02,1478.2 1209.41,1478.2 1209.41,3130 1208.63,3133.9 1206.42,3137.21 1203.11,3139.42 1199.21,3140.2 20.39,3140.2 20.39,3699.8 6278.82,3699.8
no net on POWER (split plane): 6278.82,3720.2 20.39,3720.2 20.39,4310.32 6278.82,4310.32
no net on GND (split plane): 3619.8,20.39 2706.2,20.39 2706.2,1249.8 3619.8,1249.8
GND on GND (split plane): 6278.82,20.39 3640.2,20.39 3640.2,1260 3639.42,1263.9 3637.21,1267.21 3633.9,1269.42 3630,1270.2 2696,1270.2 2692.1,1269.42 2688.79,1267.21 2686.58,1263.9 2685.8,1260 2685.8,20.39 20.39,20.39 20.39,4310.32 6278.82,4310.32
no net on GND (split plane): 261.25,426.34 285.85,421.45 309.6,413.38 332.1,402.29 352.96,388.35 371.82,371.82 388.35,352.96 402.29,332.1 413.38,309.6 421.45,285.85 426.34,261.25 427.98,236.22 426.34,211.19 421.45,186.59 413.38,162.84 402.29,140.34 388.35,119.48 371.82,100.62 352.96,84.09 332.1,70.15 309.6,59.06 285.85,50.99 261.25,46.1 236.22,44.46 211.19,46.1 186.59,50.99 162.84,59.06 140.34,70.15 119.48,84.09 100.62,100.62 84.09,119.48 70.15,140.34 59.06,162.84 50.99,186.59 46.1,211.19 44.46,236.22 46.1,261.25 50.99,285.85 59.06,309.6 70.15,332.1 84.09,352.96 100.62,371.82 119.48,388.35 140.34,402.29 162.84,413.38 186.59,421.45 211.19,426.34 236.22,427.98
no net on GND (split plane): 6088.02,426.34 6112.62,421.45 6136.38,413.38 6158.87,402.29 6179.73,388.35 6198.59,371.82 6215.13,352.96 6229.06,332.1 6240.16,309.6 6248.22,285.85 6253.11,261.25 6254.75,236.22 6253.11,211.19 6248.22,186.59 6240.16,162.84 6229.06,140.34 6215.13,119.48 6198.59,100.62 6179.73,84.09 6158.87,70.15 6136.38,59.06 6112.62,50.99 6088.02,46.1 6062.99,44.46 6037.96,46.1 6013.36,50.99 5989.61,59.06 5967.11,70.15 5946.26,84.09 5927.4,100.62 5910.86,119.48 5896.92,140.34 5885.83,162.84 5877.77,186.59 5872.87,211.19 5871.23,236.22 5872.87,261.25 5877.77,285.85 5885.83,309.6 5896.92,332.1 5910.86,352.96 5927.4,371.82 5946.26,388.35 5967.11,402.29 5989.61,413.38 6013.36,421.45 6037.96,426.34 6062.99,427.98
no net on GND (split plane): 261.25,4284.61 285.85,4279.72 309.6,4271.65 332.1,4260.56 352.96,4246.62 371.82,4230.08 388.35,4211.22 402.29,4190.37 413.38,4167.87 421.45,4144.12 426.34,4119.52 427.98,4094.49 426.34,4069.46 421.45,4044.86 413.38,4021.1 402.29,3998.61 388.35,3977.75 371.82,3958.89 352.96,3942.35 332.1,3928.42 309.6,3917.32 285.85,3909.26 261.25,3904.37 236.22,3902.73 211.19,3904.37 186.59,3909.26 162.84,3917.32 140.34,3928.42 119.48,3942.35 100.62,3958.89 84.09,3977.75 70.15,3998.61 59.06,4021.1 50.99,4044.86 46.1,4069.46 44.46,4094.49 46.1,4119.52 50.99,4144.12 59.06,4167.87 70.15,4190.37 84.09,4211.22 100.62,4230.08 119.48,4246.62 140.34,4260.56 162.84,4271.65 186.59,4279.72 211.19,4284.61 236.22,4286.25
no net on GND (split plane): 6088.02,4284.61 6112.62,4279.72 6136.38,4271.65 6158.87,4260.56 6179.73,4246.62 6198.59,4230.08 6215.13,4211.22 6229.06,4190.37 6240.16,4167.87 6248.22,4144.12 6253.11,4119.52 6254.75,4094.49 6253.11,4069.46 6248.22,4044.86 6240.16,4021.1 6229.06,3998.61 6215.13,3977.75 6198.59,3958.89 6179.73,3942.35 6158.87,3928.42 6136.38,3917.32 6112.62,3909.26 6088.02,3904.37 6062.99,3902.73 6037.96,3904.37 6013.36,3909.26 5989.61,3917.32 5967.11,3928.42 5946.26,3942.35 5927.4,3958.89 5910.86,3977.75 5896.92,3998.61 5885.83,4021.1 5877.77,4044.86 5872.87,4069.46 5871.23,4094.49 5872.87,4119.52 5877.77,4144.12 5885.83,4167.87 5896.92,4190.37 5910.86,4211.22 5927.4,4230.08 5946.26,4246.62 5967.11,4260.56 5989.61,4271.65 6013.36,4279.72 6037.96,4284.61 6062.99,4286.25

## Keep-outs
Keep-Out Layer:
  the board outline again, w10

## Other copper
Top Layer:
  region net GND: 3844,1758 3824,1758 3824,1676 3844,1676
  region net VCC_4.1V: 4535.83,1749.78 4440.83,1749.78 4440.83,1699.78 4535.83,1699.78
  region net VREF_2.5V: 3844.07,1661.03 3824.07,1661.03 3824.07,1581.08 3844.07,1581.08
POWER (plane layer: these items are gaps in the copper):
  lines w20: 0,540 10,530 ; 0,1260 3630,1260 3630,720 6299.21,720 ; 0,3130 1199.21,3130 1199.21,1468 ; 0,3710 6299.21,3710 ; 1201.21,1468 4112.21,1468 ; 6297.21,460 6299.21,462 ; 6299.21,1188 4112.21,1188 4112.21,1557 4498.21,1557 4498.21,2314 6299.21,2314
GND (plane layer: these items are gaps in the copper):
  circle w10: c236.22,4094.49 r196.85
  circle w10: c6062.99,4094.49 r196.85
  circle w10: c6062.99,236.22 r196.85
  circle w10: c236.22,236.22 r196.85
  lines w20: 2696,3 2696,1260 3630,1260 3630,0

## Silkscreen, mask and mechanical layers (free items; w line width, h text height)
Top Overlay:
  lines w8: 630,350 630,430 1555,430 1555,355 ; 1950,350 1950,440 2580,440 2580,350 ; 2975,350 2975,430 3605,430 3605,350 ; 3065,360 3065,395 3105,395 3120,395 3145,420 ; 3160,390 3215,390 3215,360 ; 3366.83,356.83 3366.83,391.83 3406.83,391.83 3421.83,391.83 3446.83,416.83 ; 3461.83,386.83 3516.83,386.83 3516.83,356.83 ; 4000,355 4000,420 4480,420 4480,355 ; 4670,4000 5800,4000 ; 585,255 585,305 585,315 615,285 585,255 ; 1905,250 1935,280 1905,310 1905,300 1905,250 ; 2930,255 2960,285 2930,315 2930,305 2930,255 ; 3950,255 3980,285 3950,315 3950,305 3950,255 ; 5293.11,253.11 5293.11,303.11 5293.11,313.11 5323.11,283.11 5293.11,253.11
  text "GTU-V1.0-20160325" at 4720,4020 h120
  text "RS232" at 1290,3730 h60
  text "DIN" at 2185,455 h60
  text "20mA" at 920,445 h60
  text "DOUT" at 3155,445 h60
  text "RS485" at 4100,430 h60
  text "G" at 1000,360 h60
  text "G" at 1450,360 h60
  text "D1" at 2000,360 h60
  text "G" at 2170,360 h60
  text "D2" at 2295,360 h60
  text "G" at 2470,360 h60
  text "GND" at 5510,360 h60
  text "V+" at 675,355 h60
  text "A1" at 830,355 h60
  text "V+" at 1130,355 h60
  text "A2" at 1270,355 h60
  text "V+" at 5345,355 h60
  text "+" at 4060,334.65 h80
  text "-" at 4210,334.65 h80

## Text inside footprints (layer, text, board x,y; h text height)
EC1: Top Overlay "+" at 561.07,2660.61 h40 r270; Top Overlay "+" at 561.07,3015.61 h40 r270
EC2: Top Overlay "+" at 5619.21,1012.87 h40 r180; Top Overlay "+" at 5974.21,1012.87 h40 r180
EC3: Top Overlay "+" at 4701.21,1307.13 h40; Top Overlay "+" at 5056.21,1307.13 h40
EC4: Top Overlay "+" at 5489.21,1307.13 h40; Top Overlay "+" at 5134.21,1307.13 h40
EC5: Top Overlay "+" at 561.07,1425.61 h40 r270; Top Overlay "+" at 561.07,1780.61 h40 r270
EC6: Top Overlay "+" at 5935.21,2270 h40 r180; Top Overlay "+" at 5935.21,2170 h40 r180
J9: Top Overlay "R" at 4382.6,2340 h40 r180; Top Overlay "G" at 4382.6,2740 h40 r180; Top Overlay "+" at 4382.6,2440 h40 r180; Top Overlay "D" at 4382.6,2540 h40 r180; Top Overlay "C" at 4382.6,2640 h40 r180
PTC1: Top Overlay "t" at 5484.66,554 h40
PTC2: Top Overlay "t" at 3095.21,803.94 h40 r270
PTC3: Top Overlay "t" at 3525.21,803.94 h40 r270
Q1: Top Overlay "3" at 413.31,2020.61 h40 r90; Top Overlay "1" at 413.31,1840.61 h40 r90
SM1: Top Overlay "B1  B2  B3  B4" at 2879.6,3966 h40
U1: Top Overlay "1" at 5112.6,775 h40 r180